# Altium PCB LED.PcbDoc
Units mm, origin at the board's own origin, x right, y up, seen from the top; angles counter-clockwise.
Board outline 454.2 x 137.7 mm, 2 copper layers (Top Layer, Bottom Layer); 21 components, 28 nets, 128 pads, 18 vias.
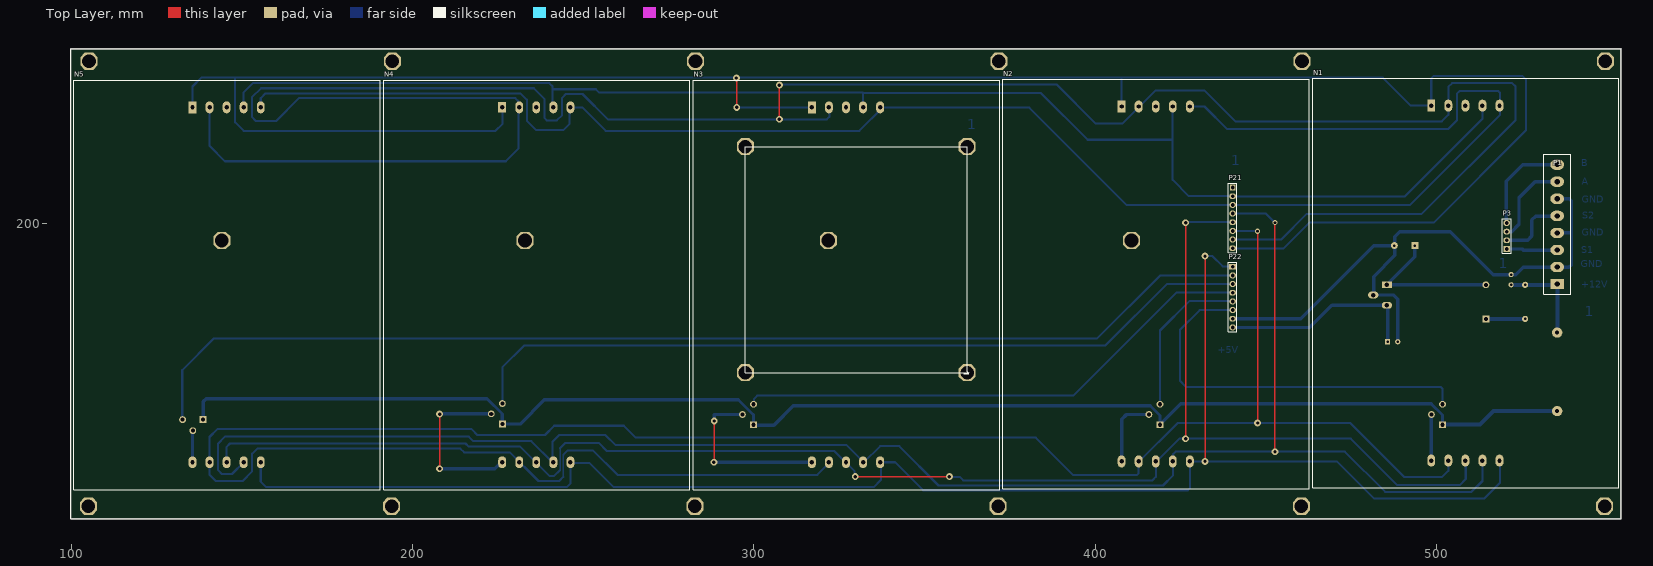
[diagram p0: Top Layer view]
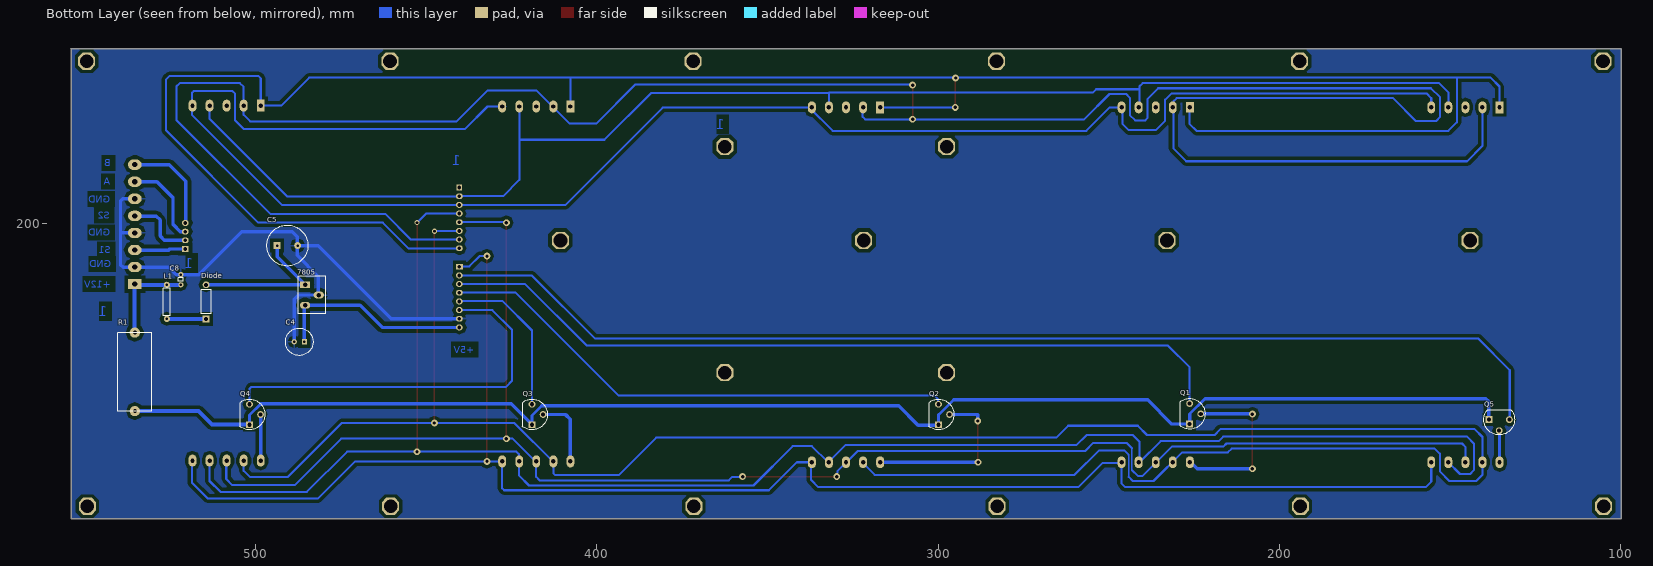
[diagram p1: Bottom Layer view, seen from below]

## Layer stack, top to bottom
Top Layer: signal copper 0.0356
Dielectric: dielectric 0.32, FR-4, Dk 4.8
Bottom Layer: signal copper 0.0356

## Board outline
554.1,251.1 554,251 554,113.4 99.9,113.4 99.9,251.1 554.1,251.1

## Design rules (kind name [scope] priority, off if disabled: settings)
Clearance [All] p1: gap=1
PlaneConnect [All] p1: planeconnectstyle=Relief reliefexpansion=0.6 reliefentries=4 reliefconductorwidth=0.6 reliefairgap=0.5
PolygonConnect [All] p1: connectstyle=Relief reliefconductorwidth=0.6 reliefentries=4 polygonreliefangle="90 Angle"
RoutingVias [All] p1: holewidth=0.711 width=1.27 viastyle="Through Hole" minholewidth=0.711 minwidth=1.27 maxholewidth=0.711 maxwidth=1.27
SilkscreenOverComponentPads [All] p1: minsilkscreentomaskgap=0.254
SolderMaskExpansion [All] p1: expansion=0.102
Width [All] p1: maxlimit=2 minlimit=0.3 preferedwidth=0.4
26 further rules are at their usual default settings.

## Components (designator, comment, footprint, x,y, rotation, side; value= is the part's Value field where it differs from the comment)
7805 "Volt Reg" 78xxC 485.5,179 r270 bottom
C4 "Cap Pol1" "tu 100uF/50v" 487.7,165.3 r0 bottom
C5 "Cap Pol1" "TU 470uF/50V" 493.7,193.5 r180 bottom
C8 "Cap" tu_gom 521.9,183 r270 bottom
Diode "Diode" D_2A 514.5,172 r90 bottom
L1 "Inductor" R_Nor 526,177 r270 bottom
N1 "LED7_90x120" LED7_90x120#1 508.5,182.5 r0 top
N2 "LED7_90x120" LED7_90x120#1 417.75,182.25 r0 top
N3 "LED7_90x120" LED7_90x120#1 327,182 r0 top
N4 "LED7_90x120" LED7_90x120#2 236.25,182 r0 top
N5 "LED7_90x120" LED7_90x120#1 145.5,182 r0 top
P1 "Header 8" "Coc 8" 535.4,197.2 r90 top
P3 "Header 4" HDR1X4 520.6,192.5 r90 top
P21 "Header 8" HDR1X8#1 440.3,210.5 r270 top
P22 "Header 8" HDR1X8#2 440.3,187.3 r270 top
Q1 "A1013" A1013 226.3,144.2 r270 bottom
Q2 "A1013" A1013 299.9,144 r270 bottom
Q3 "A1013" A1013 419,144 r270 bottom
Q4 "A1013" A1013 501.8,144 r270 bottom
Q5 "A1013" A1013 135.6,142.5 r0 bottom
R1 "22R/1W" R_CS10R/5W 535.4,145 r90 bottom

## Footprints (in the part's own frame and the unit in brackets; to place one, negate y for a bottom-side part, rotate by r counter-clockwise, add the part's x,y. Pads: shape width x height; smd on the part's side, far side on the other; paste and mask are expansions set on the pad)
78xxC [mm]
  rect 2x3 hole 1.3: 1(-3,0)
  oval 2x3 hole 1.3: 2(0,4) 3(3,0)
  silkscreen extent -5.5,-2 5.5,6
A1013 [mm]
  rect 2x2 hole 1.2: 1(3,0)
  round 2 hole 1.2: 2(0,3.25) 3(-3,0)
  silkscreen extent -4.5,-2.81 4.5,4.5
"Coc 8" [mm]
  rect 3x4 hole 1.5: 1(-15,0)
  oval 3x4 hole 1.5: 2(-10,0) 3(-5,0) 4(0,0) 5(5,0) 6(10,0) 7(15,0) 8(20,0)
  silkscreen extent -18,-4 23,4
D_2A [mm]
  rect 2x2 hole 1.2: 1(0,0)
  round 2 hole 1.2: 2(10,0)
  silkscreen extent 1.5,-1.5 8.5,1.5
HDR1X4 [mm] "Connector; Header; 4 Position"
  rect 1.7x2 hole 1.1: 1(0,0)
  oval 1.7x2 hole 1.1: 2(2.54,0) 3(5.08,0) 4(7.62,0)
  silkscreen extent -1.27,-1.27 8.89,1.27
HDR1X8#1 [mm] "Connector; Header; 8 Position"
  rect 1.7x1.7 hole 1.1: 1(0,0)
  oval 1.7x2 hole 1.1: 2(2.54,0) 3(5.08,0) 4(7.62,0) 5(10.16,0) 6(12.7,0) 7(15.24,0) 8(17.78,0)
  silkscreen extent -1.27,-1.27 19.05,1.27
HDR1X8#2 [mm] "Connector; Header; 8 Position"
  rect 1.7x2 hole 1.1: 1(0,0)
  oval 1.7x2 hole 1.1: 2(2.54,0) 3(5.08,0) 4(7.62,0) 5(10.16,0) 6(12.7,0) 7(15.24,0) 8(17.78,0)
  silkscreen extent -1.27,-1.27 19.05,1.27
LED7_90x120#1 [mm]
  rect 2.3x3.5 hole 1.3: 1(-10,52)
  oval 2.3x3.5 hole 1.3: 2(-5,52) 3(0,52) 4(5,52) 5(10,52) 6(10,-52) 7(5,-52) 8(0,-52) 9(-5,-52) 10(-10,-52)
  silkscreen extent -44.75,-60 45,60
LED7_90x120#2 [mm]
  rect 2.3x3 hole 1.3: 1(-10,52)
  oval 2.3x3.5 hole 1.3: 2(-5,52) 3(0,52) 4(5,52) 5(10,52) 6(10,-52) 7(5,-52) 8(0,-52) 9(-5,-52) 10(-10,-52)
  silkscreen extent -44.75,-60 45,60
R_CS10R/5W [mm]
  round 3 hole 1.2: 1(0,0) 2(23,0)
  silkscreen extent 0,-5 23,5
R_Nor [mm]
  round 1.8 hole 0.7: 1(-5,0) 2(5,0)
  silkscreen extent -4,-1 4,1
"tu 100uF/50v" [mil]
  rect 60x60 hole 30: 1(-78.74,0)
  round 60 hole 30: 2(39.37,0)
  silkscreen extent -178,-159 139,159
"TU 470uF/50V" [mm]
  rect 2x2 hole 0.762: 1(0,0)
  round 2 hole 0.762: 2(6,0)
  silkscreen extent -3,-6 9,6
tu_gom [mm]
  round 1.5 hole 0.7: 1(-2,0) 2(1,0)
  silkscreen extent -1,-0.75 0,0.75

## Part data
7805: "Voltage Regulator"
C4 C5: "Polarized Capacitor (Radial)"
C8: library part Ceramic, "Capcitor"
Diode: "Default Diode"
P1 P21 P22: "Header, 8-Pin"
P3: "Header, 4-Pin"
Q1 Q2 Q3 Q4 Q5: library part PNP, "PNP Bipolar Transistor"
R1: library part Res

## Free pads (board coordinates)
  oct 5x5 hole 4: 0(297.5,156.25) 1(105,117.1) 1(105.2,247.5) 1(144.1,195) 1(193.86,117.1) 1(194.06,247.5) 1(232.96,195) 1(282.72,117.1) 1(282.92,247.5) 1(297.5,222.5) 1(321.82,195) 1(371.58,117.1) 1(371.78,247.5) 1(410.68,195) 1(460.44,117.1) 1(460.64,247.5) 1(549.3,117.1) 1(549.5,247.5) 2(362.5,222.5) 3(362.5,156.25)

## Via types
v1: diameter 2, hole 1, Top Layer to Bottom Layer, 16 vias
v2: diameter 1.5, hole 0.8, Top Layer to Bottom Layer, 2 vias

## Nets (pads, with @x,y where several pads share a name; then routed paths per layer and width w, separated by ;. In a path a pad name is that pad's centre, name@x,y a point inside that pad or via, vN(x,y) a via of type N, cw(c..) or ccw(c..) an arc to the next point about the centre after c; other vN are vias at no path point)
+12V: C8.2 L1.1 P1.1 R1.2 | length 27.4
  Bottom Layer w1.2: C8.2@522.1,182 535.5,182 R1.2@535.5,168
A: N1.4 N2.4 N3.4 N4.4 N5.4 P21.2 | length 423.4
  Bottom Layer w0.4: N4.4@240.9,234.1 N4.4@241,234 ; N1.4@512.5,234.5 N1.4@513.5,233.5
  Bottom Layer w0.6: N5.4 150.5,238.4 153.2,241.1 240.1,241.1 241,240.2 N4.4@241,234 ; N4.4@240.9,234.1 N4.4@241.025,234.225 ; 241.1,239.3 253.7,239.3 254.7,238.3 331.999,238.3 N3.4@331.999,234.001 ; 331.999,238.2 384.1,238.2 397.8,224.5 422.7,224.5 ; N2.4@422.7,234.3 422.7,224.5 ; P21.2@440,207.9 490.8,207.9 513.5,230.6 N1.4@513.5,233.5 ; P21.2@440.4,207.96 427.482,207.96 422.7,212.742 422.7,224.5
A1: P22.6 Q4.3 | length 115
  Bottom Layer w0.6: P22.6@440.2,174.6 430.6,174.6 424.9,168.9 424.9,153.8 426.6,152.1 501.2,152.1 501.8,151.5 Q4.3@501.8,147.1
A2: P22.5 Q3.3 | length 46.5
  Bottom Layer w0.6: Q3.3 419,168.6 427.6,177.2 P22.5@440.3,177.2
A3: P22.4 Q2.3 | length 154.9
  Bottom Layer w0.6: Q2.3@299.5,147 300,147.5 300,148.5 301,149.5 393.6,149.5 423.8,179.7 P22.4@440.3,179.7
A4: P22.3 Q1.3 | length 234.9
  Bottom Layer w0.6: Q1.3@226,147.2 226.3,147.5 226.3,157.8 232.7,164.2 403,164.2 421,182.2 P22.3@440.4,182.2
A5: P22.2 Q5.3 | length 334
  Bottom Layer w0.6: Q5.3@132.5,142.4 132.5,157 141.8,166.3 400.6,166.3 419,184.7 P22.2@440.4,184.7
A_485: P1.7 P3.3 | length 25.4
  Bottom Layer w1: P3.3@520.5,197.6 522.1,197.6 524.2,199.7 524.2,207.5 528.9,212.2 P1.7@535.3,212.2
B: N1.5 N2.5 N3.5 N4.5 N5.5 P21.3 | length 519.2
  Bottom Layer w0.6: N5.5 155.5,236.7 156.9,238.1 231.597,238.1 233.477,236.22 233.477,230.023 236.2,227.3 244.1,227.3 246,229.2 N4.5@246,234 ; N4.5@245.8,234 249.7,234 256.6,227.1 330.9,227.1 337.7,233.9 380.7,233.9 409.18,205.42 492.32,205.42 518.6,231.7 518.6,238.3 518.1,238.8 506.8,238.8 506.1,238.1 506.1,230.3 503.4,227.6 438.7,227.6 432.055,234.245 N2.5@426.814,234.245
B_485: P1.8 P3.4 | length 29.2
  Bottom Layer w1: P3.4@520.5,200.1 520.5,212.4 525.3,217.2 P1.8
C: N1.7 N2.7 N3.7 N4.7 N5.7 P21.4 | length 509.3
  Top Layer w0.4: v1(452.7,133.1) v2(452.7,200.2)
  Bottom Layer w0.6: N5.7 147.068,126.568 144.132,126.568 143,127.7 143,135.5 145,137.5 216.5,137.5 217.8,136.2 234.8,136.2 241,130 241,136 243,138 256.5,138 259.5,135 327.2,135 332.25,129.95 337,134.7 342.6,134.7 354.1,123.2 419.9,123.2 422.775,126.075 422.775,132.275 423.6,133.1 v1(452.7,133.1) 473.2,133.1 485,121.3 510.3,121.3 513.5,124.5 N1.7@513.5,130.6 ; P21.4@440.2,202.88 450.02,202.88 v2(452.7,200.2)
D: N1.8 N2.8 N3.8 N4.8 N5.8 P21.5 | length 479.3
  Top Layer w0.4: v1(329.7,125.8) v1@357.2,125.8 ; v1(426.5,136.9) v1(426.5,200.2)
  Bottom Layer w0.4: 243.2,127.7 243.2,134.1
  Bottom Layer w0.6: N5.8 145.5,134.5 146.5,135.5 215.5,135.5 216.4,134.6 231.5,134.6 240.1,126 241.5,126 243.2,127.7 ; 243.2,134.1 244.8,135.7 254.5,135.7 256.9,133.3 323.6,133.3 329.55,127.35 329.55,126.95 ; v1@357.3,125.7 360.3,125.7 361.3,124.7 416.8,124.7 417.8,125.7 417.8,130 424.7,136.9 474.9,136.9 488.5,123.3 506.8,123.3 508.6,125.1 N1.8@508.6,130.4 ; v1@426.5,200.34 P21.5@439.5,200.34
  other v1: 357.3,125.8
DOT: N1.6 N2.6 N3.6 N4.6 N5.6 P22.1 | length 479.3
  Top Layer w0.4: v1(432.2,130.245) v1(432.2,190.4)
  Bottom Layer w0.6: N5.6 155.5,124.3 157,122.8 245.3,122.8 246.3,123.8 246.3,129.8 251.8,129.8 258.9,122.7 335.1,122.7 337.2,124.8 337.2,130 341.4,130 349.6,121.8 427.2,121.8 427.8,122.4 427.8,129.99 427.545,130.245 v1(432.2,130.245) 470.855,130.245 481.7,119.4 514.091,119.4 518.6,123.909 N1.6@518.6,130.5 ; v1(432.2,190.4) 434.4,190.4 437.4,187.4 P22.1@440.5,187.4
E: N1.9 N2.9 N3.9 N4.9 N5.9 P21.6 | length 670.9
  Top Layer w0.4: v1(447.6,141.5) v2@447.6,197.6
  Bottom Layer w0.4: 244.2,125.7 244.2,132.2
  Bottom Layer w0.6: 244.2,125.7 243,124.5 236.9,124.5 228.5,132.9 215.1,132.9 214,134 154.5,134 153,132.5 153,127.313 150.187,124.5 142.3,124.5 140.5,126.3 N5.9 140.5,137.4 142.8,139.7 217.3,139.7 219,138 238.8,138 241.5,140.7 261.9,140.7 265.4,137.2 382.6,137.2 393.5,126.3 412.3,126.3 412.665,126.665 412.665,129.965 424.2,141.5 v1(447.6,141.5) 474.7,141.5 490.5,125.7 501.7,125.7 503.5,127.5 N1.9 ; 244.2,132.2 245.5,133.5 252.843,133.5 260.043,126.3 318.6,126.3 321.7,129.4 322.1,129.4 N3.9@321.5,130 ; P21.6 v2@447.8,197.8
  other v2: 447.6,197.7
F: N1.2 N2.2 N3.2 N4.2 N5.2 P21.7 | length 752.5
  Top Layer w0.4: v1(307.5,230.5) v1(307.5,240.5)
  Bottom Layer w0.6: N5.2 140.5,222.7 145,218.2 227.3,218.2 231.1,222 231.1,235.7 230.1,236.7 166.7,236.7 160,230 154.1,230 152.9,231.2 152.9,236.9 155.6,239.6 235.5,239.6 238.6,236.5 238.6,230.9 239.3,230.2 242.3,230.2 243.8,231.7 243.8,236.8 244.9,237.9 249.8,237.9 257.2,230.5 v1(307.5,230.5) 321.4,230.5 322.1,231.2 322.1,233.4 N3.2@321.5,234 ; v1@307.4,240.7 388.7,240.7 400.2,229.2 408,229.2 417.8,239 432,239 441.1,229.9 501.6,229.9 503.5,231.8 N1.2@503.5,234.4 ; P21.7@440.1,195.26 454.46,195.26 461.9,202.7 495.6,202.7 523.2,230.3 523.2,240.1 522.2,241.1 504.6,241.1 503.5,240 503.5,235 N1.2@503,234.5
G: N1.1 N2.1 N3.1 N4.1 N5.1 P21.8 | length 661.8
  Top Layer w0.4: v1(294.9,242.6) 294.9,242.4 295,242.3 v1(295,234)
  Bottom Layer w0.6: N5.1 135.5,240.1 138.1,242.7 484.3,242.7 492.5,234.5 N1.1 498.5,242.5 499.2,243.2 525.2,243.2 526.2,242.2 526.2,227.2 499.2,200.2 462.7,200.2 455.1,192.6 P21.8@440.2,192.6 ; 148,242.5 148,229.6 150.5,227.1 224.3,227.1 226.3,229.1 226.3,233.7 N4.1@226,234 ; v1(295,234) N3.1@316.5,234 ; N2.1 407.75,242.55
GND: 7805.2 C4.2 C5.2 C8.1 P1.2 P1.4 P1.6 P22.7 | length 181.8
  Top Layer w0.4: 7805.2@480.492,179 7805.2@480.5,179
  Bottom Layer w1: P22.7@440.6,172.1 460.3,172.1 481.7,193.5 C5.2@487.8,193.5 ; C4.2@488.7,165.4 488.7,177.8 487.5,179 481.6,179 481.6,184.4 487.8,190.6 487.8,196.1 489.2,197.5 504.1,197.5 516.6,185 520.2,185 523.2,185 525.4,187.2 P1.2@533.4,187.2 ; 533.4,187.1 538.8,187.1 539.6,187.9 539.6,206.5 538.9,207.2 P1.6 ; P1.4@535.3,197.2 539.5,197.2
Net7805_1: 7805.1 C5.1 Diode.2 | length 44.9
  Bottom Layer w1: 7805.1@484.5,182 7805.1 ; C5.1 493.7,190.2 7805.1 ; Diode.2 7805.1
NetDiode_1: Diode.1 L1.2 | length 11.7
  Bottom Layer w1.2: Diode.1@514.25,172 L1.2
NetN1_10: N1.10 Q4.2 | length 13.6
  Bottom Layer w1: N1.10 Q4.2@498.5,144.1
NetN2_10: N2.10 Q3.2 | length 21
  Bottom Layer w1: N2.10@407.6,130.2 407.8,130.4 407.8,142.6 409.2,144 Q3.2
NetN3_10: N3.10 Q2.2 | length 50
  Top Layer w0.4: v1@288.4,130.1 v1(288.4,142.1)
  Bottom Layer w1: v1(288.3,130) N3.10@316.5,130 ; v1@288.4,142 288.4,144 Q2.2@296.2,144
NetN4_10: N4.10 Q1.2 | length 49.6
  Top Layer w0.4: v1(207.9,128.1) v1@207.9,144
  Bottom Layer w1: v1(207.9,128.1) 224.1,128.1 N4.10@226,130 ; v1@208.1,144.2 Q1.2@222.9,144.2
  other v1: 207.9,144.1
NetN5_10: N5.10 Q5.2 | length 9.3
  Bottom Layer w1: N5.10 Q5.2@135.5,139.25
NetQ1_1: Q1.1 Q2.1 Q3.1 Q4.1 Q5.1 R1.1 | length 429.4
  Bottom Layer w0.8: 221.8,148.6 226.3,144.1 ; 295.5,148.3 299.9,143.9 ; 416.1,146.6 419,143.7 ; 498.483,147.117 501.8,143.8
  Bottom Layer w1: Q5.1@138.7,142.3 138.7,147.8 139.5,148.6 221.8,148.6 ; 226.3,144.1 Q1.1 231.5,141.2 238.6,148.3 295.5,148.3 ; Q2.1@299.9,140.9 299.9,143.9 ; Q2.1@300,140.9 305.9,140.9 311.6,146.6 416.1,146.6 ; 419,143.7 Q3.1 425.117,147.117 498.483,147.117 ; Q4.1@501.8,141.1 501.8,143.8
  Bottom Layer w1.2: Q4.1@501.8,141.1 512.8,141.1 516.7,145 R1.1
SENSOR1: P1.3 P3.1 | length 13.1
  Bottom Layer w1: P3.1 525.1,192.5 525.5,192.1 P1.3@533.5,192.1
SENSOR2: P1.5 P3.2 | length 18.5
  Bottom Layer w1: P3.2 526.74,195.04 528,196.3 528,201 529.1,202.1 533.4,202.1
VCC: 7805.3 C4.1 P22.8 | length 58.6
  Bottom Layer w1: P22.8@440.3,169.5 462.9,169.5 469.4,176 485.7,176 C4.1@485.7,165.5
pads on no net: N1.3 N2.3 N3.3 N4.3 N5.3 P21.1

## Polygon pours and split planes (outlines as drawn)
GND on Bottom Layer "Top Layer-No Net" (solid, remove dead copper, pour order 1000): 100,251 100,113.5 554,113.5 554,251 100,251

## Other copper
Bottom Layer:
  text "1" at 362.6,227.6 h3
  text "1" at 439.9,217.1 h3
  text "B" at 542.5,216.7 h2
  text "A" at 542.6,211.3 h2
  text "GND" at 542.6,206.1 h2
  text "S2" at 542.7,201.3 h2
  text "GND" at 542.6,196.3 h2
  text "S1" at 542.5,191.3 h2
  text "GND" at 542.3,187.1 h2
  text "1" at 518.2,186.9 h3
  text "+12V" at 542.4,181.2 h2
  text "1" at 543.5,172.8 h3
  text "+5V" at 436,162 h2

## Silkscreen, mask and mechanical layers (free items; w line width, h text height)
Top Overlay:
  lines w0.254: 361.5,155.9 361.5,156 ; 361.5,156 362.9,156 361.5,156 ; 99.9,113.4 554.1,113.4 554.1,251.1 99.9,251.1 99.9,113.4 ; 297.5,156.25 297.5,222.5 362.5,222.5 362.5,156.5 363,156.25 297.5,156.25